# EAGLE board circuit (EAGLE 9.7.0)

Size 186.6 x 124.84 mm. Coordinates in mm from the lower left corner, seen from the top.
Outline: 0,0 186.6,0 186.6,124.84 0,124.84 0,0
Copper layers (1*16): Top 0.035mm / dielectric 1.5mm / Bottom 0.035mm
Design rules "default": minimum track width 6mil, minimum drill 0.35mm, track to track 6mil, track to pad 6mil, pad to pad 6mil, via to via 6mil, smd to smd 6mil, copper to edge 40mil, drill to drill 6mil, minimum pad ring 10mil, minimum via ring 8mil, stop-mask expansion 4mil, vias tented up to drill 0mil, thermal gap 10mil

## Footprints (pad centres in the part's own frame; a part is rotated, then mirrored left to right if it is on the bottom)
MQ-XX-SOCKET = drill 1.27: 1 -6.223,6.223; 2 -8.788,0; 3 -6.223,-6.223; 4 6.223,-6.223; 5 8.788,0; 6 6.223,6.223
WS2812-STRIP = drill 1.016 long: 1 -3.81,0; 2 -1.27,0; 3 1.27,0; 4 3.81,0
BATTERY-GENERIC = drill 1.118 pad 3.15 octagon: + 2.54,0; - -2.54,0
PIEZO = drill 1 pad 1.6: 1 -3.5,0; 2 3.5,0
RESAD1016W63L850D250B = drill 0.83 pad 1.43: 1 -5.08,0; 2 5.08,0
DIP787W55P254L958H533Q8B-8P3 = drill 0.852 pad 1.452: 1 -3.81,3.81; 2 -3.81,1.27; 3 -3.81,-1.27; 4 -3.81,-3.81; 5 3.81,-3.81; 6 3.81,-1.27; 7 3.81,1.27; 8 3.81,3.81
TSOP48 = drill 0.8: 1 -2.54,0; 2 0,0; 3 2.54,0

## Placement (x,y rotation side)
GAS1  GAS-SENSORMQ-XX-SOCKET  [MQ-XX-SOCKET]  141.08,64.61 270 top
LED1  WS2812B_STRIP  [WS2812-STRIP]  42.67,116.51 270 top
LED2  WS2812B_STRIP  [WS2812-STRIP]  178.26,111.33 180 top
LED3  WS2812B_STRIP  [WS2812-STRIP]  172.82,8.33 90 top
P1  BATTERYGENERIC  [BATTERY-GENERIC]  8.26,71.95 180 top
PIEZO1  PIEZO  [PIEZO]  63.65,54.45 0 top
R1  4.7k  [RESAD1016W63L850D250B]  105.56,36.67 90 top
R2  100  [RESAD1016W63L850D250B]  52.22,51.91 0 top
RING1  WS2812B_STRIP  [WS2812-STRIP]  141.07,63.9 0 top
U1  ATtiny25-20PU  [DIP787W55P254L958H533Q8B-8P3]  45.87,63.34 90 top
U2  IR-RECEIVERTSOP48  [TSOP48]  52.22,69.69 0 top

## Library data of the parts
GAS1 LED1-LED3 P1 PIEZO1 R1 R2 RING1 U2 = Tinkercad
U1 = Tinkercad; CATEGORY: IC_Embedded; CORE: AVR; DESCRIPTION: AVR AVR® ATtiny, Functional Safety (FuSa) Microcontroller IC 8-Bit 20MHz 2KB (1K x 16) FLASH 8-PDIP; MANUFACTURER: Microchip Technology; MPN: ATtiny25-20PU; OPERATING_TEMP: -40°C to 85°C; PART_STATUS: Active; ROHS_COMPLIANT: COMPLIANT; SERIES: ATtiny25; SPEED: 20 MHz; SUB-CATEGORY: Microcontroller; TYPE: AVR Microcontroller

## Nets
LED1_DOUT: LED1.4 LED2.1
LED2_DOUT: LED2.4 LED3.1
P1+: GAS1.1 GAS1.2 GAS1.3 LED1.2 LED2.2 LED3.2 P1.+ PIEZO1.2 RING1.2 U1.8 U2.3
P1-: GAS1.5 LED1.3 LED2.3 LED3.3 P1.- R1.2 RING1.3 U1.4 U2.2
PIEZO1_1: PIEZO1.1 R2.2
U1_PB0: U1.5 U2.1
U1_PB1: RING1.1 U1.6
U1_PB2: LED1.1 U1.7
U1_PB3: GAS1.4 GAS1.6 R1.1 U1.2
U1_PB4: R2.1 U1.3

## Tracks (layer width: path | path; a pad name or v marks a point on that pad's centre or on a via)
LED1_DOUT  (1 unrouted)
LED2_DOUT  (1 unrouted)
P1+  (10 unrouted)
P1-  (8 unrouted)
PIEZO1_1  (1 unrouted)
U1_PB0  (1 unrouted)
U1_PB1  (1 unrouted)
U1_PB2  (1 unrouted)
U1_PB3  (3 unrouted)
U1_PB4  (1 unrouted)